# EAGLE board PSCommutationRobot (EAGLE 6.3)
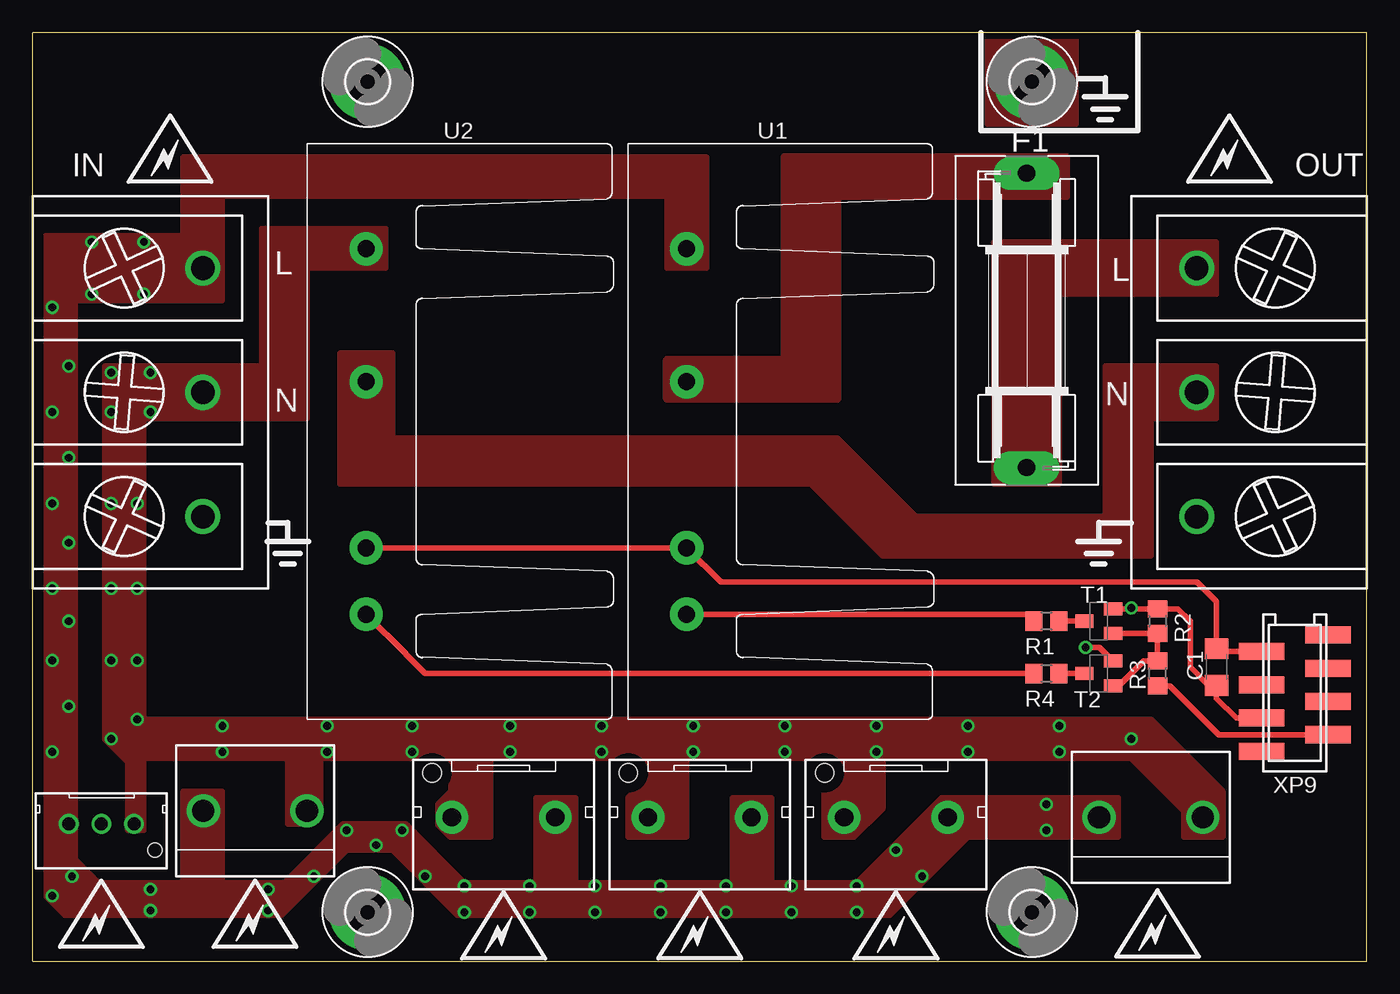
[diagram p0: board, top side]
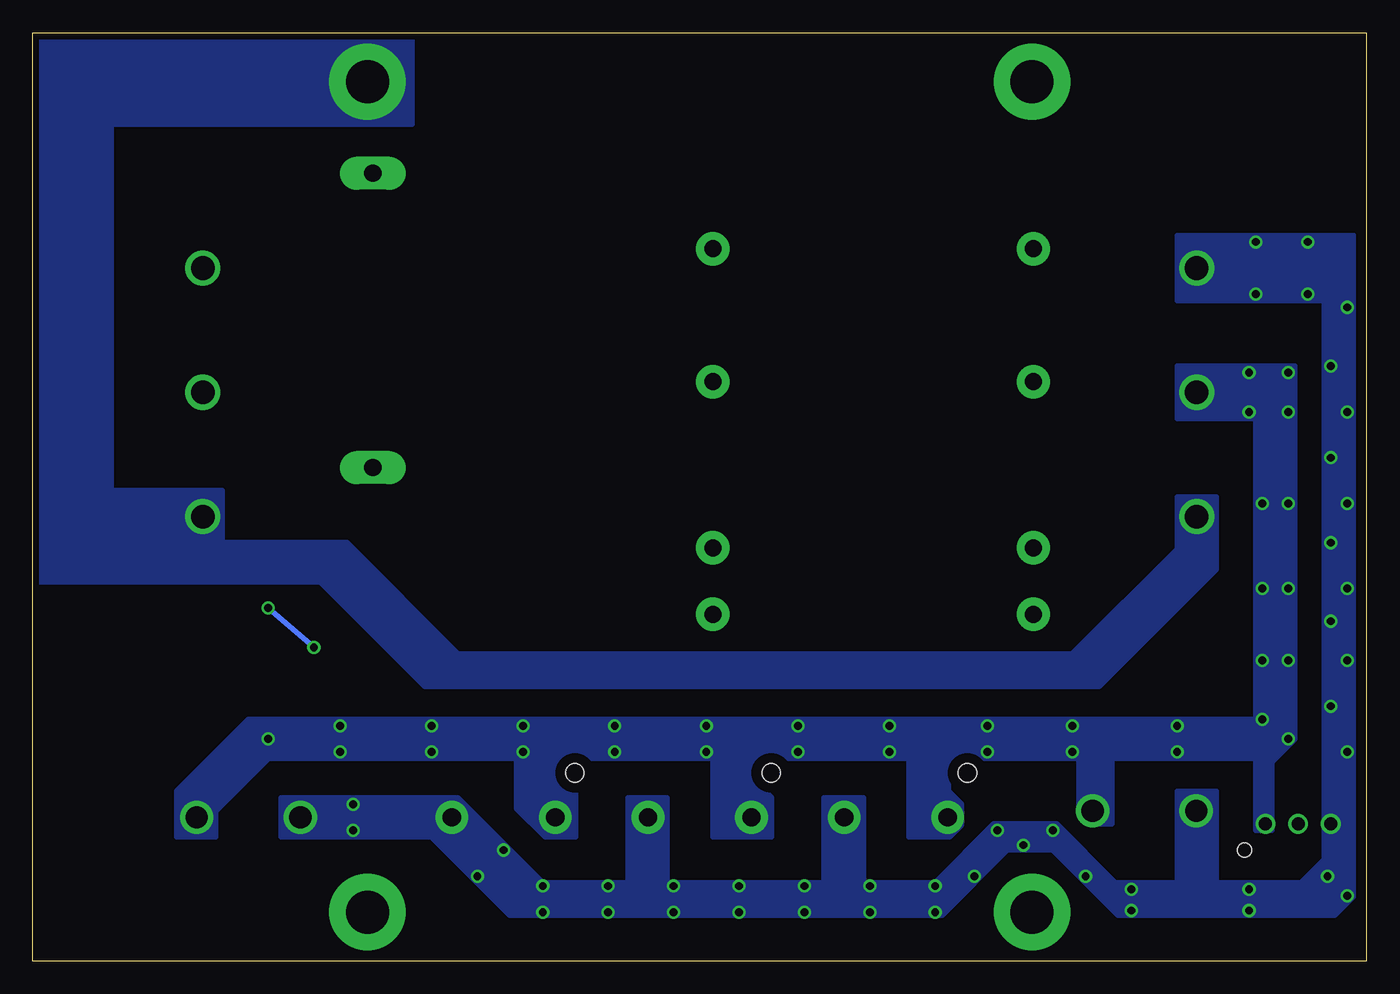
[diagram p1: board, bottom side, seen from below]

Size 102 x 71 mm. Coordinates in mm from the lower left corner, seen from the top.
Outline: 0,0 102,0 102,71 0,71 0,0
Copper layers (1*16): Top 0.035mm / dielectric 1.5mm / Bottom 0.035mm
Design rules "default *": minimum track width 10mil, minimum drill 0.4mm, track to track 0.2mm, track to pad 0.2mm, pad to pad 0.2mm, via to via 0.2mm, smd to smd 0mil, copper to edge 0.5mm, drill to drill 8mil, minimum pad ring 10mil, minimum via ring 0.2mm, stop-mask expansion 0mil, vias tented up to drill 0.6mm, thermal gap 10mil

## Footprints (pad centres in the part's own frame; a part is rotated, then mirrored left to right if it is on the bottom)
C1206 = smd 1.6 x 1.8: 1 -1.4,0; 2 1.4,0
SH22,5A = drill 1.321 pad 2.54 long: 1 -11.252,0; 2 11.252,0
3,3-PAD = drill 3.3 pad 5.842: B3,3 0,0
R0805 = smd 1.3 x 1.5: 1 -0.95,0; 2 0.95,0
SOT23-BEC = smd 1 x 1.4: B -0.95,-1.1; C 0,1.1; E 0.95,-1.1
CRYDOM_PF240D25 = drill 1.3 pad 2.54: 1 -13.97,0; 2 -3.81,0; 3 8.89,0; 4 13.97,0
JST_B3B-XH-AM = drill 1 pad 1.5: 1 -2.5,0; 2 0,0; 3 2.5,0 | hole 1.1: -4.1,2
MOLEX_09-65-2038_WITHOUT_CENTRAL_PIN = drill 1.7 pad 2.5: 1 -3.96,0; 2 3.96,0
JST_B3P-VH-FB-B_WITHOUT_CENTRAL_PIN = drill 1.4 pad 2.5: 1 -3.96,0; 3 3.96,0 | hole 1.4: -5.46,3.4
DINKLE_DT-49-B01W-03 = drill 1.8: 1 -9.5,0; 2 0,0; 3 9.5,0
MMT-F-SMD-8 = smd 1.3 x 3.5: 1 4.445,-2.54; 2 3.175,2.54; 3 1.905,-2.54; 4 0.635,2.54; 5 -0.635,-2.54; 6 -1.905,2.54; 7 -3.175,-2.54; 8 -4.445,2.54

## Placement (x,y rotation side)
C1  10uF  [C1206]  90.5,22.5 270 top
F1  FH-102  [SH22,5A]  76,49 270 top
H1  MOUNT-PAD-ROUND3.3  [3,3-PAD]  76.4,3.75 90 top
H2  MOUNT-PAD-ROUND3.3  [3,3-PAD]  25.6,67.25 90 top
H3  MOUNT-PAD-ROUND3.3  [3,3-PAD]  25.6,3.75 90 top
H4  MOUNT-PAD-ROUND3.3  [3,3-PAD]  76.4,67.25 90 top
R1  220R 5%  [R0805]  77.5,26 180 top
R2  10K 5%  [R0805]  86,26 270 top
R3  1K 5%  [R0805]  86,22 90 top
R4  220R 5%  [R0805]  77.5,22 180 top
T1  BC847  [SOT23-BEC]  81.5,26 90 top
T2  BC847  [SOT23-BEC]  81.5,22 90 top
U1  PF240D25  [CRYDOM_PF240D25]  50,40.5 270 top
U2  PF240D25  [CRYDOM_PF240D25]  25.5,40.5 270 top
U$1  [ICON_BOLT-S]  10.5,61.5 0 top
U$2  [ICON_BOLT-S]  91.5,61.5 0 top
U$3  [ICON_BOLT-S]  86,2.25 0 top
U$4  [ICON_BOLT-S]  66,2.12 0 top
U$5  [ICON_BOLT-S]  51,2.12 0 top
U$6  [ICON_BOLT-S]  36,2.12 0 top
U$7  [ICON_BOLT-S]  17,3 0 top
U$8  [ICON_BOLT-S]  5.25,3 0 top
U$9  [ICON_GND2]  19.5,31 0 top
U$10  [ICON_GND2]  81.5,31 0 top
U$12  [ICON_GND2]  82,65 0 top
XP1  B3B-XH-A(M)  [JST_B3B-XH-AM]  5.25,10.5 180 top
XP2  09-65-2038  [MOLEX_09-65-2038_WITHOUT_CENTRAL_PIN]  17,11.5 0 top
XP3  09-65-2038  [MOLEX_09-65-2038_WITHOUT_CENTRAL_PIN]  85.5,11 0 top
XP4  B3P-VH-FB-B  [JST_B3P-VH-FB-B_WITHOUT_CENTRAL_PIN]  36,11 0 top
XP5  B3P-VH-FB-B  [JST_B3P-VH-FB-B_WITHOUT_CENTRAL_PIN]  51,11 0 top
XP6  B3P-VH-FB-B  [JST_B3P-VH-FB-B_WITHOUT_CENTRAL_PIN]  66,11 0 top
XP7  DT-49-B01W-03  [DINKLE_DT-49-B01W-03]  13,43.5 90 top
XP8  DT-49-B01W-03  [DINKLE_DT-49-B01W-03]  89,43.5 270 top
XP9  7-188275-8  [MMT-F-SMD-8]  96.5,20.5 90 top

## Library data of the parts
C1 R1-R4 = rcl
F1 = fuse; OC_FARNELL: unknown; OC_NEWARK: unknown
H1-H4 = holes
T1 T2 = transistor
U1 U2 XP1-XP8 = my_components
U$1-U$10 U$12 = dicons
XP9 = con-amp-micromatch

## Nets
ACL_IN: U1.1 XP1.3 XP2.1 XP3.1 XP4.3 XP5.3 XP6.3 XP7.3
ACL_OUT: F1.1 U1.2
ACN_IN: U2.1 XP1.1 XP2.2 XP3.2 XP4.1 XP5.1 XP6.1 XP7.2
ACN_OUT: U2.2 XP8.2
GND: H4.B3,3 XP7.1 XP8.3
GNDI: C1.2 R2.1 T1.E T2.E XP9.6
LVTTL_ON_!OFF: R3.1 XP9.7
N$1: R1.1 T1.C
N$2: R1.2 U1.4
N$3: R2.2 R3.2 T1.B T2.B
N$4: R4.1 T2.C
N$5: R4.2 U2.4
N$6: F1.2 XP8.1
VCC: C1.1 U1.3 U2.3 XP9.2

## Tracks (layer width: path | path; a pad name or v marks a point on that pad's centre or on a via)
ACL_IN  (via drill 0.6)
  other vias: 8.5,55 8.5,51 4.5,51 1.5,50 1.5,42 1.5,35 1.5,28.5 1.5,23 2.75,19.5 1.5,16 1.5,5 3,6.5 18,5.5 24,10 9,3.88 9,5.5 18,3.88 33,5.75 38,5.75 43,5.75 48,5.75 58,5.75 63,5.75 33,3.75 43,3.75 58,3.75 66,8.5 68,6.5 77.5,12 28.25,10 38,3.75 48,3.75 63,3.75 53,3.75 53,5.75 77.5,10 4.5,55 2.75,26 2.75,32 2.75,38.5 2.75,45.5 26.25,8.88 21.5,6.5 30,6.5
  pour Top (no thermals): 11.5,50.5 11.5,61.5 51.5,61.5 51.5,53 48.5,53 48.5,58.5 14.5,58.5 14.5,50.5
  pour Top (isolate 0.8, no thermals): 14.5,55.5 1,55.5 1,5 2.5,3.5 19,3.5 24,8.5 27.5,8.5 32.5,3.5 65.5,3.5 71.5,9.5 83,9.5 83,12.5 69.5,12.5 63,6 56.5,6 56.5,12.5 53.5,12.5 53.5,6 41.5,6 41.5,12.5 38.5,12.5 38.5,6 33,6 28.5,10.5 23.75,10.5 19.25,6 14.5,6 14.5,13 11.5,13 11.5,6 5,6 3.25,7.75 3.25,50.5 14.5,50.5
  pour Bottom (isolate 0.8, no thermals): 14.5,55.5 1,55.5 1,5 2.5,3.5 19,3.5 24,8.5 27.5,8.5 32.5,3.5 65.5,3.5 71.5,9.5 83,9.5 83,12.5 69.5,12.5 63,6 56.5,6 56.5,12.5 53.5,12.5 53.5,6 41.5,6 41.5,12.5 38.5,12.5 38.5,6 33,6 28.5,10.5 23.75,10.5 19.25,6 14.5,6 14.5,13 11.5,13 11.5,6 5,6 3.25,7.75 3.25,50.5 14.5,50.5
ACL_OUT
  pour Top (no thermals): 48.5,46 57.5,46 57.5,61.5 79,61.5 79,58.5 61.5,58.5 61.5,43 48.5,43
ACN_IN  (via drill 0.6)
  other vias: 6,45 9,45 6,42 9,42 6,28.5 8,28.5 6,17 8,18.5 14.5,16 14.5,18 22.5,16 22.5,18 29,16 29,18 36.5,16 36.5,18 43.5,16 43.5,18 50.5,16 50.5,18 57.5,16 57.5,18 71.5,16 71.5,18 64.5,16 64.5,18 78.5,18 78.5,16 84,17 8,23 6,23 6,35 8,35
  pour Top (no thermals): 12,45.5 17.5,45.5 17.5,56 27,56 27,53 21,53 21,41.5 12,41.5
  pour Bottom (isolate 0.8, no thermals): 14.5,45.5 5.5,45.5 5.5,17 7.25,15.25 7.25,10 8.5,10 8.5,15.5 19.5,15.5 19.5,10.5 21,10.5 22,11.5 22,15.5 32,15.5 32,13 31,12 31,10.41 31.91,9.5 35,9.5 35,15.5 47,15.5 47,14 45.5,12.5 45.5,9.5 50,9.5 50,15.5 60.5,15.5 60.5,9.5 62.79,9.5 65,11.71 65,15.5 84,15.5 88,11.5 88,9.5 91,9.5 91,13 85.5,18.5 8.5,18.5 8.5,41.5 14.5,41.5
  pour Top (isolate 0.8, no thermals): 14.5,45.5 5.5,45.5 5.5,17 7.25,15.25 7.25,10 8.5,10 8.5,15.5 19.5,15.5 19.5,10.5 21.09,10.5 22,11.41 22,15.5 32,15.5 32,13 31,12 31,10.41 31.91,9.5 35,9.5 35,15.5 47,15.5 47,14 45.5,12.5 45.5,9.5 50,9.5 50,15.5 60.5,15.5 60.5,9.5 62.79,9.5 65,11.71 65,15.5 84,15.5 88,11.5 88,9.5 91,9.5 91,13 85.5,18.5 8.5,18.5 8.5,41.5 14.5,41.5
ACN_OUT
  pour Top (no thermals): 23.5,46.5 23.5,36.5 59.5,36.5 65,31 85.5,31 85.5,41.5 90.5,41.5 90.5,45.5 82,45.5 82,34 67.5,34 61.5,40 27.5,40 27.5,46.5
GND
  pour Bottom (no thermals): 11.5,35.5 11.5,30 20.5,21 72,21 80,29 89.5,29 92,31.5 92,36 88,36 88,32.5 87.5,32 78,32 69.5,23.5 22.5,23.5 14.5,31.5 14.5,35.5
  pour Bottom (no thermals): 87.5,29 101.5,29 101.5,70.5 73,70.5 73,64 96,64 96,36 87.5,36
  pour Top (no thermals): 73,70.62 73,64 79.75,64 79.75,70.62
GNDI  (via drill 0.6)
  Top 0.406: 84.05,26.95 R2.1 87.55,26.95 88.5,26 88.5,22.5 89.9,21.1 C1.2 90.5,20.1 92,18.59 XP9.6 | T2.E 81.55,24 v80.5,24 | v84,27 84.05,26.95 | 84.05,26.95 T1.E
  Bottom 0.406: v80.5,24 v84,27
LVTTL_ON_!OFF
  Top 0.406: XP9.7 90.67,17.32 86.95,21.05 R3.1
N$1
  Top 0.406: T1.C R1.1
N$2
  Top 0.406: R1.2 76.05,26.5 52,26.5 | 52,26.5 51.5,26.5 | U1.4 51.97,26.53 52,26.5
N$3
  Top 0.406: T2.B 83.05,21.05 84.95,22.95 R3.2 R2.2 T1.B
N$4
  Top 0.406: T2.C R4.1
N$5
  Top 0.406: R4.2 30,22 28.5,23.5 28.53,23.5 U2.4
N$6
  pour Top (no thermals): 90.5,55 90.5,51 78.5,51 78.5,36.5 73.5,36.5 73.5,55
VCC
  Top 0.406: U2.3 U1.3 52.61,29 89,29 90.5,27.5 C1.1 90.78,23.68 XP9.2

## Text on the board
tPlace: IN | OUT | L | L | N | N
Reference: Внимание: при монтаже выводных компонентов / методом волновой пайки - наклеить защитную / плёнку в указанных местах.